# EAGLE board DMX_Transmiter v35 (EAGLE 9.7.0)
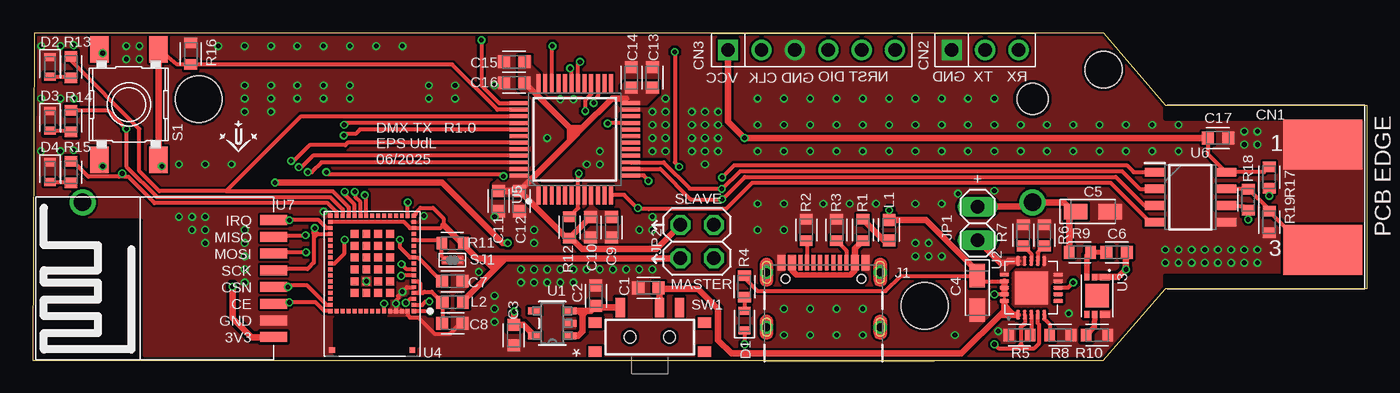
[diagram p0: board, top side]
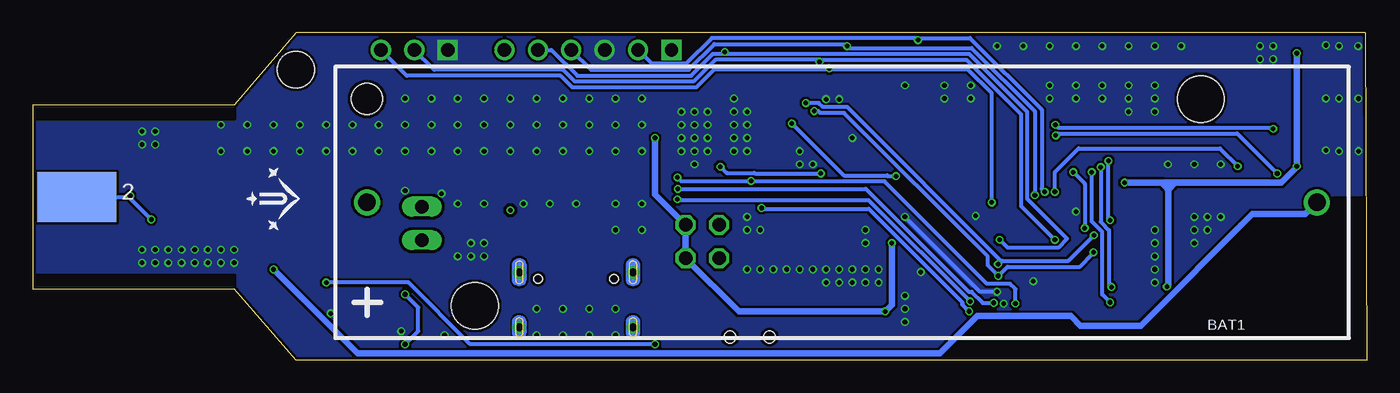
[diagram p1: board, bottom side, seen from below]

Size 101.4 x 24.9 mm. Coordinates in mm from the lower left corner, seen from the top.
Outline: 0.1,24.9 0,0 81.4,0 86.1,5.4 101.4,5.4 101.4,19.4 86.1,19.4 81.4,24.9 0.1,24.9
Copper layers (1*16): Top / Bottom
Stack-up Default Layer Stack: Top User Defined 0.018mm / Dielectric-1 User Defined 1.55mm / Bottom User Defined 0.018mm
Design rules: minimum copper width 0.15mm, minimum drill size 0.35mm, copper clearance wire_polygon to wire_polygon 0.15mm, copper clearance wire_polygon to pad_smd 0.15mm, copper clearance wire_polygon to via 0.15mm, copper clearance pad_smd to pad_smd 0.15mm, copper clearance pad_smd to via 0.15mm, copper clearance via to via 0.15mm, copper clearance smd to pad (same net) 0mil, copper clearance smd to via (same net) 0mil, copper clearance smd to smd (same net) 0mil, dimension clearance 0.25mm, via restrict clearance 0mil, restrict clearance 0mil, drill distance 0.35mm, keepout clearance 0mil
Holes 2.8 mm at 81.4,22.1
RestrictTop: area 23,0.5 to 29.2,3.1; area 0.2,0 to 8.2,12.3; area 86.1,18.4 to 102.1,20.4; area 86.1,4.4 to 102.1,6.4
RestrictBottom: area 0.2,0 to 8.2,12.3; area 23,0.5 to 29.2,3.1; area 86.1,18.4 to 102.1,20.4; area 86.1,4.4 to 102.1,6.4

## Footprints (pad centres in the part's own frame; a part is rotated, then mirrored left to right if it is on the bottom)
BH_KEYSTONE_1043 = drill 1.32 pad 1.98: 1 0,0; 2 -72.22,0 | hole 3.55: -8.2,7.87; -63.4,-7.87 | hole 2.39: 0,-7.87
CAPC1608X85 = smd 0.921 x 0.97: 1 -0.775,0; 2 0.775,0
CAPMP3216X180N = smd 1.796 x 1.189: 1 -1.31,0; 2 1.31,0
XLR_PINS = smd 6 x 3.8: 1 2.8,4; 3 2.8,-4 | smd 6 x 3.8 bottom: 2 2.8,0
CON_1X03_2.54 = drill 1.02 square: 1 -2.54,0 | drill 1.02: 2 0,0; 3 2.54,0
CON_1X06_2.54 = drill 1.016 square: 1 -6.35,0 | drill 1.016: 2 -3.81,0; 3 -1.27,0; 4 1.27,0; 5 3.81,0; 6 6.35,0
LEDC1608X35N_FLAT-Y = smd 0.612 x 0.912: A 0.75,0; C -0.75,0
LEDC1608X35N_FLAT-B = smd 0.612 x 0.912: A 0.75,0; C -0.75,0
LEDC1608X35N_FLAT-G = smd 0.612 x 0.912: A 0.75,0; C -0.75,0
LEDC1608X35N_FLAT-R = smd 0.612 x 0.912: A 0.75,0; C -0.75,0
GCT-USB4105GFA = smd 0.6 x 1.15: A1_B12 -3.2,4.914; A4_B9 -2.4,4.914; B1_A12 3.2,4.914; B4_A9 2.4,4.914 | smd 0.3 x 1.15: A5 -1.25,4.914; A6 -0.25,4.914; A7 0.25,4.914; A8 1.25,4.914; B5 1.75,4.914; B6 0.75,4.914; B7 -0.75,4.914; B8 -1.75,4.914 | drill 0.6 pad 1: SH1 -4.32,4.18; SH2 4.32,4.18; SH3 -4.32,0; SH4 4.32,0 | hole 0.65: 2.89,3.68; -2.89,3.68
1X02 = drill 1.016 long: 1 -1.27,0; 2 1.27,0
2X02 = drill 1.016 octagon: 1 -1.27,-1.27; 2 -1.27,1.27; 3 1.27,-1.27; 4 1.27,1.27
INDC1608X95N = smd 0.9 x 0.97: 1 -0.785,0 | smd 0.933 x 0.97: 2 0.769,0
RESC1608X60 = smd 0.799 x 0.974: 1 -0.815,0; 2 0.815,0
SWITCH_6X6X7.3 = smd 2 x 1.4: 1 -4.2,2.25; 2 4.2,2.25; 3 -4.2,-2.25; 4 4.2,-2.25
SOLDER_JUMPER_2_SMALL_OFF = smd 0.4 x 0.4: 1 -0.5,0; 2 0.5,0
MSK-12C02 = smd 0.7 x 1.5: O -2.25,2.25; P 0.75,2.25; S 2.25,2.25 | smd 1 x 0.8: P$1 -4.15,1.1; P$2 -4.15,-1.1; P$3 4.15,-1.1; P$4 4.15,1.1 | hole 0.9: -1.5,0; 1.5,0
SOT23_DBV_TEX = smd 0.972 x 0.508: 1 -1.362,0.95; 2 -1.362,0; 3 -1.362,-0.95; 4 1.362,-0.95; 5 1.362,0.95
QFN50P400X400X100-21N = smd 0.73 x 0.3: 1 -2.05,1; 2 -2.05,0.5; 3 -2.05,0; 4 -2.05,-0.5; 5 -2.05,-1; 11 2.05,-1; 12 2.05,-0.5; 13 2.05,0; 14 2.05,0.5; 15 2.05,1 | smd 0.3 x 0.73: 6 -1,-2.05; 7 -0.5,-2.05; 8 0,-2.05; 9 0.5,-2.05; 10 1,-2.05; 16 1,2.05; 17 0.5,2.05; 18 0,2.05; 19 -0.5,2.05; 20 -1,2.05 | smd 2.5 x 2.5: 21 0,0
U-DFN2030-6 = smd 0.5 x 0.75: 1 -1.42,0.6; 6 1.42,0.6 | smd 0.5 x 0.4: 2 -1.42,-0.175; 3 -1.42,-0.775; 4 1.42,-0.775; 5 1.42,-0.175 | smd 1.76 x 1.8: 7 0,0
SIP-LGA86 = smd 0.35 x 0.35: 1 -3.175,2.075; 17 -3.175,-5.175; 31 3.175,-5.175; 47 3.175,2.075 | smd 0.35 x 0.3: 2 -3.175,1.6; 3 -3.175,1.15; 4 -3.175,0.7; 5 -3.175,0.25; 6 -3.175,-0.2; 7 -3.175,-0.65; 8 -3.175,-1.1; 9 -3.175,-1.55; 10 -3.175,-2; 11 -3.175,-2.45; 12 -3.175,-2.9; 13 -3.175,-3.35; 14 -3.175,-3.8; 15 -3.175,-4.25; 16 -3.175,-4.7; 32 3.175,-4.7; 33 3.175,-4.25; 34 3.175,-3.8; 35 3.175,-3.35; 36 3.175,-2.9; 37 3.175,-2.45; 38 3.175,-2; 39 3.175,-1.55; 40 3.175,-1.1; 41 3.175,-0.65; 42 3.175,-0.2; 43 3.175,0.25; 44 3.175,0.7; 45 3.175,1.15; 46 3.175,1.6 | smd 0.3 x 0.35: 18 -2.7,-5.175; 19 -2.25,-5.175; 20 -1.8,-5.175; 21 -1.35,-5.175; 22 -0.9,-5.175; 23 -0.45,-5.175; 24 0,-5.175; 25 0.45,-5.175; 26 0.9,-5.175; 27 1.35,-5.175; 28 1.8,-5.175; 29 2.25,-5.175; 30 2.7,-5.175; 48 2.7,2.075; 49 2.25,2.075; 50 1.8,2.075; 51 1.35,2.075; 52 0.9,2.075; 53 0.45,2.075; 54 0,2.075; 55 -0.45,2.075; 56 -0.9,2.075; 57 -1.35,2.075; 58 -1.8,2.075; 59 -2.25,2.075; 60 -2.7,2.075 | smd 0.6 x 0.6: 61 -1.35,0.7; 62 -1.35,-0.2; 63 -1.35,-1.1; 64 -1.35,-2; 65 -1.35,-2.9; 66 -1.35,-3.8; 67 -0.45,-3.8; 68 0.45,-3.8; 69 1.35,-3.8; 70 1.35,-2.9; 71 1.35,-2; 72 1.35,-1.1; 73 1.35,-0.2; 74 1.35,0.7; 75 0.45,0.7; 76 -0.45,0.7; 77 -0.45,-0.2; 78 -0.45,-1.1; 79 -0.45,-2; 80 -0.45,-2.9; 81 0.45,-2.9; 82 0.45,-2; 83 0.45,-1.1; 84 0.45,-0.2 | smd 0.43 x 0.43: 85 -3.05,5.035; 86 3.05,5.035
QFP50P900X900X160-48N = smd 1.475 x 0.3: 1 -4.238,2.75; 2 -4.238,2.25; 3 -4.238,1.75; 4 -4.238,1.25; 5 -4.238,0.75; 6 -4.238,0.25; 7 -4.238,-0.25; 8 -4.238,-0.75; 9 -4.238,-1.25; 10 -4.238,-1.75; 11 -4.238,-2.25; 12 -4.238,-2.75; 25 4.238,-2.75; 26 4.238,-2.25; 27 4.238,-1.75; 28 4.238,-1.25; 29 4.238,-0.75; 30 4.238,-0.25; 31 4.238,0.25; 32 4.238,0.75; 33 4.238,1.25; 34 4.238,1.75; 35 4.238,2.25; 36 4.238,2.75 | smd 0.3 x 1.475: 13 -2.75,-4.238; 14 -2.25,-4.238; 15 -1.75,-4.238; 16 -1.25,-4.238; 17 -0.75,-4.238; 18 -0.25,-4.238; 19 0.25,-4.238; 20 0.75,-4.238; 21 1.25,-4.238; 22 1.75,-4.238; 23 2.25,-4.238; 24 2.75,-4.238; 37 2.75,4.238; 38 2.25,4.238; 39 1.75,4.238; 40 1.25,4.238; 41 0.75,4.238; 42 0.25,4.238; 43 -0.25,4.238; 44 -0.75,4.238; 45 -1.25,4.238; 46 -1.75,4.238; 47 -2.25,4.238; 48 -2.75,4.238
SOIC127P600X175-8N = smd 1.528 x 0.65: 1 -2.711,1.905; 2 -2.711,0.635; 3 -2.711,-0.635; 4 -2.711,-1.905; 5 2.711,-1.905; 6 2.711,-0.635; 7 2.711,0.635; 8 2.711,1.905
NRF24L01_MINI_MODULE = smd 2.032 x 0.762: 1 0,4.445; 2 0,3.175; 3 0,1.905; 4 0,0.635; 5 0,-0.635; 6 0,-1.905; 7 0,-3.175; 8 0,-4.445

## Placement (x,y rotation side)
BAT1  BATTERY_HOLDER_KEYSTONE_1043  [BH_KEYSTONE_1043]  76,12 180 bottom
C1  1uF  [CAPC1608X85]  46.8,5.5 180 top
C2  1uF  [CAPC1608X85]  42.8,4.9 90 top
C3  1uF  [CAPC1608X85]  36.56,1.9 270 top
C4  4.7uF  [CAPMP3216X180N]  71.8,5.1 270 top
C5  4.7uF  [CAPMP3216X180N]  80.6,11.3 0 top
C6  100nF  [CAPC1608X85]  82.4,8.2 0 top
C7  10uF  [CAPC1608X85]  31.9,6 0 top
C8  100nF  [CAPC1608X85]  31.9,2.8 0 top
C9  100nF  [CAPC1608X85]  44,10.1 90 top
C10  1uF  [CAPC1608X85]  42.4,10.1 90 top
C11  100nF  [CAPC1608X85]  35.4,12.1 90 top
C12  10uF  [CAPC1608X85]  37,12.1 90 top
C13  100nF  [CAPC1608X85]  47.1,21.5 90 top
C14  10uF  [CAPC1608X85]  45.5,21.5 90 top
C15  100nF  [CAPC1608X85]  36.6,22.7 180 top
C16  10uF  [CAPC1608X85]  36.6,21.1 180 top
C17  100nF  [CAPC1608X85]  90.1,16.9 0 top
CN1  XLR_CONNECTOR  [XLR_PINS]  95.25,12.4 0 top
CN2  CON_1X03/2.54  [CON_1X03_2.54]  72.4,23.6 0 top
CN3  CON_1X06  [CON_1X06_2.54]  59.2,23.6 0 top
D1  CHIP-FLAT-Y_0603-0.35MM  [LEDC1608X35N_FLAT-Y]  54.1,3 90 top
D2  CHIP-FLAT-B_0603-0.35MM  [LEDC1608X35N_FLAT-B]  1.3,22.3 270 top
D3  CHIP-FLAT-G_0603-0.35MM  [LEDC1608X35N_FLAT-G]  1.3,18.2 270 top
D4  CHIP-FLAT-R_0603-0.35MM  [LEDC1608X35N_FLAT-R]  1.3,14.3 270 top
J1  USB4105GFA  [GCT-USB4105GFA]  60.1,2.5 0 top
JP1  PINHD-1X2  [1X02]  71.83,10.4 270 top
JP2  PINHD-2X2  [2X02]  50.5,9.02 90 top
L1  3.3uH  [INDC1608X95N]  65.1,9.9 90 top
L2  BLM18AG601SN1D  [INDC1608X95N]  31.9,4.4 180 top
LOGO1  UDL_LOGO_MED  [UDL_LOGO_MED]  81.1,9.9 90 bottom
LOGO2  UDL_LOGO_SMALL  [UDL_LOGO_SMALL]  14.2,15.8 0 top
R1  0  [RESC1608X60]  63.1,9.9 270 top
R2  5K1  [RESC1608X60]  58.8,9.9 270 top
R3  5K1  [RESC1608X60]  61.1,9.9 270 top
R4  4K7  [RESC1608X60]  54.1,5.6 270 top
R5  4K7  [RESC1608X60]  75,1.9 180 top
R6  10K  [RESC1608X60]  76.9,9.5 270 top
R7  1K  [RESC1608X60]  75.3,9.5 270 top
R8  10K  [RESC1608X60]  78.1,1.9 180 top
R9  470  [RESC1608X60]  79.6,8.2 180 top
R10  2K7  [RESC1608X60]  80.9,1.9 180 top
R11  4K7  [RESC1608X60]  31.9,8.9 180 top
R12  4K7  [RESC1608X60]  40.8,10.1 90 top
R13  470  [RESC1608X60]  2.9,22.3 90 top
R14  470  [RESC1608X60]  2.9,18.2 90 top
R15  470  [RESC1608X60]  2.9,14.3 90 top
R16  100K  [RESC1608X60]  12,23.3 270 top
R17  10K  [RESC1608X60]  94,13.9 270 top
R18  120  [RESC1608X60]  92.4,12.2 90 top
R19  10K  [RESC1608X60]  94,10.5 270 top
S1  SWITCH_SMD_TACT_6X6  [SWITCH_6X6X7.3]  7.3,19.45 90 top
SJ1  0  [SOLDER_JUMPER_2_SMALL_OFF]  31.9,7.6 0 top
SW1  SWITCH_MSK-12C02  [MSK-12C02]  46.9,1.75 0 top
U1  TPS7A02  [SOT23_DBV_TEX]  39.5,2.8 180 top
U2  MCP73871_2CCI/ML  [QFN50P400X400X100-21N]  75.9,5.5 90 top
U3  AP9211SA-AC-HAC-7  [U-DFN2030-6]  80.9,4.9 270 top
U4  STM32WB5MMGH6TR  [SIP-LGA86]  25.8,5.8 180 top
U5  STM32L072CBT6  [QFP50P900X900X160-48N]  41.2,16.8 90 top
U6  SP3485EN-L  [SOIC127P600X175-8N]  88,12.4 0 top
U7  NRF24L01_MINI_MODULESMD  [NRF24L01_MINI_MODULE]  18.3,6.2 180 top

## Library data of the parts
BAT1 = Marcel-SystemsIntegration-24-25; DESCRIPTION: KEYSTONE - 1043 - BATTERY HOLDER, 18650, TH; HEIGHT: 14.86mm; MANUFACTURER_NAME: Keystone Electronics; MANUFACTURER_PART_NUMBER: 1043; MOUSER_PART_NUMBER: 534-1043; MOUSER_PRICE-STOCK: https://www.mouser.co.uk/ProductDetail/Keystone-Electronics/1043?qs=%2F7TOpeL5Mz6j%2FnxeOA1rsg%3D%3D
C1-C3 C6-C17 = Capacitor; CATEGORY: Capacitor; PACKAGE_SIZE: 0603; PACKAGE_TYPE: Surface Mount; SUBCATEGORY: Ceramic Capacitors; TYPE: MLCC
C4 C5 = Capacitor; CATEGORY: Capacitor; PACKAGE_SIZE: 1206; PACKAGE_TYPE: Surface Mount; SUBCATEGORY: Tantalum Capacitors; TYPE: Polymer Capacitors
CN1 = Library_projecte
CN2 CN3 LOGO1 LOGO2 SJ1 U7 = Marcel-SystemsIntegration-24-25
D1 = LED; CATEGORY: LED; COLOR: Yellow; DESCRIPTION: Yellow LED Indication 0603 (1608 Metric); PACKAGE_SIZE: 0603; PACKAGE_TYPE: Surface Mount; SUBCATEGORY: Chip LED; TYPE: Square with Flat Top
D2 = LED; CATEGORY: LED; COLOR: Blue; DESCRIPTION: Blue LED Indication 0603 (1608 Metric); PACKAGE_SIZE: 0603; PACKAGE_TYPE: Surface Mount; SUBCATEGORY: Chip LED; TYPE: Square with Flat Top
D3 = LED; CATEGORY: LED; COLOR: Green; DESCRIPTION: Green LED Indication 0603 (1608 Metric); PACKAGE_SIZE: 0603; PACKAGE_TYPE: Surface Mount; SUBCATEGORY: Chip LED; TYPE: Square with Flat Top
D4 = LED; CATEGORY: LED; COLOR: Red; DESCRIPTION: Red LED Indication 0603 (1608 Metric); PACKAGE_SIZE: 0603; PACKAGE_TYPE: Surface Mount; SUBCATEGORY: Chip LED; TYPE: Square with Flat Top
J1 = Marcel-SystemsIntegration-24-25; FARNELL_CODE: 3588205
JP1 = Connector; CATEGORY: Connectors; DESCRIPTION: Header-Straight-2 Position; PACKAGE_TYPE: Through Hole; PITCH: 0.100" (2.54mm); SUBCATEGORY: Headers; TYPE: Male Pins
JP2 = Connector; CATEGORY: Connectors; DESCRIPTION: Header-Straight-2x2 Position; PACKAGE_TYPE: Through Hole; PITCH: 0.100" (2.54mm); SUBCATEGORY: Headers; TYPE: Male Pins
L1 L2 = Inductor; CATEGORY: Inductors; DESCRIPTION: Chip 1.60 X 0.80 X 0.95 mm body 0603(1608-METRIC); PACKAGE_SIZE: 0603; PACKAGE_TYPE: Surface Mount
R1-R19 = Resistor; CATEGORY: Resistors; DESCRIPTION: Chip Resistor 1.60 X 0.82 X 0.60 mm body 0603(1608-METRIC) Package; PACKAGE_SIZE: 0603; PACKAGE_TYPE: Surface Mount
S1 = Marcel-SystemsIntegration-24-25; OC_EBAY: https://www.ebay.es/itm/183740462435; RS: 682-1254
SW1 = Marcel-SystemsIntegration-24-25; EBAY: https://www.ebay.es/itm/50pcs-MSK-12C02-2-Position-7pins-1P2T-Miniature-Horizontal-Slide-Switch/360895616269?hash=item54070e150d:g:IJoAAOSwxCxT4jcO; PROD_ID: SWCH-10651
U1 = Library_projecte; COPYRIGHT: Copyright (C) 2025 Ultra Librarian. All rights reserved.; MANUFACTURER_PART_NUMBER: TPS7A0212PDBVR; MFR_NAME: Texas Instruments
U2 = Marcel-SystemsIntegration-24-25; MANUFACTURER: MICROCHIP; MANUFACTURER_ID: MCP73871- 2CCI/ML; SOURCE: Farnell: 1642489
U3 = Marcel-SystemsIntegration-24-25; MANUFACTURER: Diodes Incorporated; MANUFACTURER_ID: AP9211SA-ACHAC- 7; SOURCE: Mouser; SOURCE_ID: 621- AP9211SA-ACHAC7
U4 = Marcel-SystemsIntegration-24-25; DESCRIPTION: 802.15.4, Bluetooth Bluetooth v5.0, Thread, Zigbee® Transceiver Module 2.4GHz Integrated, Chip Surface Mount; MF: STMicroelectronics; MP: STM32WB5MMGH6TR; PACKAGE: LFLGA-86 STMicroelectronics; PRICE: None; PURCHASE-URL: https://pricing.snapeda.com/search/part/STM32WB5MMGH6TR/?ref=eda
U5 = Marcel-SystemsIntegration-24-25; DESCRIPTION: ARM Microcontrollers - MCU 16/32-BITS MICROS; HEIGHT: 1.6mm; MANUFACTURER_NAME: STMicroelectronics; MANUFACTURER_PART_NUMBER: STM32L072CBT6; MOUSER_PART_NUMBER: 511-STM32L072CBT6; MOUSER_PRICE-STOCK: https://www.mouser.co.uk/ProductDetail/STMicroelectronics/STM32L072CBT6?qs=dTJS0cRn7ojAyJ%2FoC1SuOQ%3D%3D
U6 = Marcel-SystemsIntegration-24-25; DESCRIPTION: RS-485 Interface IC 3.3 V powered, up to 10 Mbps RS-485 transceiver; HEIGHT: 1.75mm; MANUFACTURER_NAME: MaxLinear; MANUFACTURER_PART_NUMBER: SP3485

## Nets
2.8V: C3.1 C17.1 CN3.1 JP2.1 JP2.3 R17.1 S1.1 S1.2 U1.5 U6.8 U7.1
A: CN1.2 R17.2 R18.1 U6.6
B: CN1.3 R18.2 R19.1 U6.7
DMX_DE: U4.2 U5.14 U6.3
DMX_RE: U4.3 U5.15 U6.2
DMX_RX: U4.56 U5.13 U6.1
DMX_TX: U4.1 U5.12 U6.4
GND: C1.2 C2.2 C3.2 C4.2 C5.2 C7.2 C8.2 C9.1 C10.1 C11.1 C12.1 C13.2 C14.2 C15.2 C16.2 C17.2 CN1.1 CN2.1 CN3.3 D2.C D3.C D4.C J1.A1_B12 J1.B1_A12 R2.1 R3.1 R5.2 R6.1 R7.1 R8.1 R10.1 R16.1 R19.2 SJ1.2 U1.2 U2.9 U2.10 U2.11 U2.21 U3.6 U4.5 U4.16 U4.31 U4.57 U4.58 U4.59 U4.60 U4.84 U4.86 U5.8 U5.23 U5.35 U5.44 U5.47 U6.5 U7.2
LED_BLUE: R13.2 U4.28 U5.39
LED_GREEN: R14.2 U4.29 U5.40
LED_RED: R15.2 U4.30 U5.41
MASTER_VCC: JP2.2 L2.1 R11.1 U4.15 U4.17 U4.32
N$1: J1.B5 R3.2
N$2: J1.A5 R2.2
N$3: J1.A4_B9 J1.B4_A9 R1.2
N$4: L1.1 R1.1
N$5: D1.A R4.2
N$6: C8.1 L2.2 U4.4 U4.6
N$7: R11.2 SJ1.1 U4.13
N$8: D2.A R13.1
N$9: D3.A R14.1
N$10: D4.A R15.1
N$11: D1.C U2.8
N$12: R5.1 U2.3
N$13: C6.1 R9.1 U3.3
N$14: BAT1.2 C6.2 U3.1 U3.2
N$15: R8.2 U2.5
N$16: R7.2 U2.13
N$17: R6.2 U2.12
N$18: R10.2 U3.5
N$19: JP1.2 U2.14 U2.15 U2.16
N$21: C2.1 SW1.O U1.1 U1.3
NRF24_CE: U4.47 U5.46 U7.3
NRF24_CSN: U4.46 U5.45 U7.4
NRF24_IRQ: U4.33 U5.43 U7.8
NRST: C7.1 CN3.5 R12.2 U4.10 U5.7
PUSHBUTTON: R16.2 S1.3 S1.4 U4.27 U5.38
SLAVE_VCC: C9.2 C10.2 C11.2 C12.2 C13.1 C14.1 C15.1 C16.1 JP2.4 R12.1 U5.1 U5.9 U5.24 U5.36 U5.48
SPI2_MISO: U4.8 U5.27 U7.7
SPI2_MOSI: U4.7 U5.28 U7.6
SPI2_SCK: U4.34 U5.21 U7.5
SWCLK: CN3.2 U4.26 U5.37
SWDIO: CN3.4 U4.25 U5.34
USART1_RX: CN2.3 U4.18 U5.31
USART1_TX: CN2.2 U4.39 U5.30
VBAT: BAT1.1 C5.1 JP1.1 R9.2
VIN: C4.1 L1.2 R4.1 U2.2 U2.4 U2.17 U2.18 U2.19
VLOAD: C1.1 SW1.P U2.1 U2.20

## Tracks (layer width: path | path; a pad name or v marks a point on that pad's centre or on a via)
2.8V  (via drill 0.35)
  Top 0.3: 89.23,16.78 C17.1 89.32,15.69 U6.8 93.59,14.3 R17.1
  Top 0.5: U7.1 16.62,1.74 15.18,3.18 v15.18,5.58 v15.19,5.58 | S1.1 v5.31,14.75 | S1.2 v5.31,23.35 | v18.4,13.5 31.1,13.5 35.7,8.9 v36.1,8.9 | CN3.1 52.85,18.15 v54.1,16.9 C17.1 | U1.5 37.31,2.67 C3.1 36.6,2.72 v36.6,3.7
  Bottom 0.4: 14.5,13.5 15.08,12.92
  Bottom 0.5: v18.4,13.5 15.6,13.5 15.59,13.5 | 15.59,13.5 15.08,12.99 15.08,12.92 | 15.08,12.92 15.08,5.69 v15.19,5.58 | v5.31,23.35 v5.31,14.75 5.31,14.69 6.5,13.5 14.5,13.5 15.59,13.5 | 15.1,12.93 15.08,12.92 | v36.1,8.9 36.1,4.2 v36.6,3.7 47.72,3.7 JP2.1 JP2.3 54.1,12.62 v54.1,16.9
A  (via drill 0.35)
  Top 0.3: U6.6 90.79,11.69 92.1,11.69 R18.1 92.44,10.75 v92.4,10.7 | v94,12.5 R17.2
  Bottom 0.3: 98.45,11.8 CN1.2 94.1,12.4 v94,12.5 94,12.3 v92.4,10.7
B
  Top 0.3: U6.7 90.73,13.02 R18.2 94,11.46 R19.1 96.91,8.4 CN1.3
DMX_DE  (via drill 0.35)
  Top 0.3: U5.14 47.7,14.55 50.01,12.24 v52.4,12.24 52.59,12.43 52.62,12.43 54.13,13.93 82.33,13.93 84.5,11.77 U6.3 | U4.2 29.6,4.2 29.86,4.46 v30.14,4.46
  Bottom 0.3: v52.4,12.24 52.34,12.18 37.86,12.18 v30.14,4.46
DMX_RE  (via drill 0.35)
  Top 0.3: U5.15 47.95,15.05 49.96,13.04 52.36,13.04 | 52.36,13.04 52.44,13.04 53.78,14.38 82.8,14.38 84.15,13.04 U6.2 | U4.3 28.68,4.65 28.38,4.35 v28.35,4.35 | v52.37,13.03 52.36,13.04
  Bottom 0.3: v28.35,4.35 29.19,4.35 30.04,5.2 30.25,5.2 38.07,13.03 v52.37,13.03
DMX_RX  (via drill 0.35)
  Top 0.3: U4.56 v26.7,4.3 | U5.13 46.44,14.05 46.8,13.69 v46.8,13.64 | v52.4,13.9 53.33,14.83 83.16,14.83 83.69,14.3 U6.1
  Bottom 0.3: v52.4,13.9 52.1,13.6 46.84,13.6 v46.8,13.64 46.76,13.6 36.65,13.6 28.86,5.8 27.1,5.8 26.7,5.4 v26.7,4.3
DMX_TX  (via drill 0.35)
  Top 0.3: 46,11.51 46,11.49 46.84,11.49 46.85,11.5 52.7,11.5 54.68,13.48 81.94,13.48 84.93,10.5 U6.4 | 46,11.51 44.95,12.56 U5.12 | v30.21,3.71 30.2,3.73 U4.1 | 46,11.51 v46,11.58
  Bottom 0.3: v30.21,3.71 30.37,3.86 30.39,3.86 30.74,4.21 30.74,4.39 37.85,11.5 45.93,11.5 v46,11.58
GND  (via drill 0.35)
  Top 0.3: U4.57 U4.58 | U4.58 U4.59 U4.60 28.5,3.43 28.68,3.25 29.31,3.25 30.54,2.02 31.71,2.02 32.5,2.8 C8.2 | U4.58 v27.6,4.3 27.6,4.53 27.75,4.68 27.75,4.85 v28.1,5.2 28.45,5.55 U4.5
  Bottom 0.3: v28.1,5.2 29.4,5.2 v35.1,10.9
  other vias: 73.4,2.2 13.1,8.9 93.1,17.4 93.1,16.4 92.1,16.4 92.1,17.4 90.1,8.4 93.1,7.4 92.1,7.4 89.1,7.4 90.1,7.4 91.1,7.4 91.1,8.4 92.1,8.4 93.1,8.4 79.1,17.9 75.1,17.9 73.1,17.9 73.1,19.9 71.1,19.9 71.1,17.9 69.1,17.9 69.1,19.9 67.1,19.9 67.1,17.9 65.1,17.9 65.1,19.9 63.1,19.9 63.1,17.9 61.1,17.9 61.1,19.9 59.1,19.9 59.1,17.9 22.1,11.3 25.35,6 59.1,15.9 61.1,15.9 63.1,15.9 65.1,15.9 67.1,15.9 69.1,15.9 71.1,15.9 73.1,15.9 75.1,15.9 77.1,15.9 79.1,15.9 81.1,15.9 83.1,15.9 70.1,1.9 60.1,11.9 62.1,11.9 64.1,11.9 69.1,7.9 67.1,7.9 63.1,3.9 57.1,3.9 57.1,1.9 63.1,1.9 35.1,20.9 38.1,9.9 81.1,17.9 69.1,11.9 67.1,11.9 35.1,2.9 33.9,6.7 35.1,4.9 35.1,3.9 13.1,9.9 16.1,9.9 16.1,8.9 16.1,7.9 16.1,6.9 16.1,5.9 16.1,23.9 18.1,23.9 20.1,23.9 22.1,23.9 14.1,23.9 24.1,23.9 48.1,16.9 48.1,18.9 8.1,23.9 7.1,23.9 7.1,22.9 8.1,22.9 13.1,10.9 12.1,10.9 12.1,9.9 11.1,10.9 2.1,23.9 2.1,19.9 3.1,23.96 3.1,19.9 0.63,19.9 0.65,23.9 0.61,15.9 2.1,15.9 3.1,15.96 16.1,20.9 16.1,18.9 18.1,18.9 18.1,20.9 20.1,20.9 22.1,20.9 24.1,20.9 32.1,20.9 32.1,19.9 30.1,19.9 24.1,19.9 22.1,19.9 20.1,19.9 18.1,19.9 16.1,19.9 15.1,14.9 13.1,14.9 11.1,14.9 78.76,3.54 30.1,20.9 83.1,17.9 29.72,10.98 57.1,17.9 57.1,19.9 55.1,19.9 55.1,17.9 55.1,15.9 57.1,15.9 51.1,18.9 51.1,16.9 51.1,14.9 77.1,17.9 88.1,7.4 87.1,7.4 86.1,7.4 86.1,8.4 87.1,8.4 88.1,8.4 89.1,8.4 73.1,12.88 70.34,12.66 37.1,5.9 38.1,5.9 39.1,5.9 40.1,5.9 41.1,5.9 37.1,6.9 38.1,6.9 39.1,6.9 40.1,6.9 41.1,6.9 42.1,6.9 43.1,6.9 44.1,6.9 45.1,6.9 46.1,6.9 47.1,6.9 47.1,9.9 46.1,9.9 47.1,10.9 38.1,8.9 26.1,23.9 28.1,23.9 48.1,17.9 48.1,15.9 50.1,15.9 50.1,17.9 50.1,18.9 51.1,17.9 50.1,16.9 51.1,15.9 52.1,15.9 52.1,16.9 52.1,17.9 52.1,18.9 47.1,18.9 47.1,17.9 47.1,16.9 47.1,15.9 43.1,15.9 43.1,14.9 42.1,14.9 48.1,19.9 39.1,16.9 40.1,19.85 41.1,19.85 57.1,11.9 55.1,11.9 55.1,9.9 57.1,9.9 68.1,8.9 67.1,8.9 68.1,7.9 59.1,3.9 59.1,1.9 61.1,1.9 61.1,3.9 85.1,17.9 87.1,17.9 85.1,15.9 87.1,15.9
  pour Top (isolate 0.2, rank 2, no thermals): -1.9,27.9 104.1,27.9 104.1,-3.1 -1.9,-3.1
  pour Bottom (isolate 0.2, no thermals): -1.9,27.9 104.1,27.9 104.1,-3.1 -1.9,-3.1
LED_BLUE
  Top 0.3: U4.28 24,11.65 22.8,12.85 14.7,12.85 | 14.7,12.85 9.62,12.85 8.1,14.37 8.1,17.59 2.9,22.79 R13.2 | 14.7,12.85 20.4,18.55 U5.39
LED_GREEN  (via drill 0.35)
  Top 0.3: U4.29 23.55,11.46 22.61,12.4 9.44,12.4 7.11,14.73 v7.11,17.59 5.68,19.01 R14.2 | U5.40 23.66,18.05 v23.66,17.9
  Bottom 0.3: v23.66,17.9 23.46,17.7 7.21,17.7 v7.11,17.59
LED_RED  (via drill 0.35)
  Top 0.3: U4.30 23.1,11.27 22.42,11.95 9.25,11.95 7.25,13.95 7.04,13.95 | U5.41 24.87,17.55 24.52,17.2 23.74,17.2 v23.64,17.09 | 6.54,13.95 4.23,13.95 3.06,15.12 R15.2 | 6.54,13.95 v6.79,14.2 7.04,13.95 | 7.04,13.95 6.54,13.95
  Bottom 0.3: v23.64,17.09 23.49,17.24 9.84,17.24 v6.79,14.2
MASTER_VCC
  Top 0.3: 29,10.95 U4.17 29.12,11.12 29.12,11.23 29.47,11.58 30.42,11.58 31.21,10.79 31.21,10.29 30.98,10.05 U4.15 28.68,10.05 28.23,10.5 U4.32
  Top 0.5: 32.6,8.9 R11.1 | 31.21,10.29 32.6,8.9 | L2.1 32.69,4.49 35.1,6.9 | 35.95,7.75 JP2.2 | 34.25,7.75 33.75,7.75 32.6,8.9 | 35.1,6.9 35.95,7.75 | 35.95,7.75 35.1,7.75 | 35.1,7.75 35.1,6.9 | 35.1,6.9 34.25,7.75 | 35.1,7.75 34.25,7.75
N$1
  Top 0.3: R3.2 61.85,8.34 J1.B5
N$2
  Top 0.3: R2.2 58.85,9.04 J1.A5
N$3
  Top 0.4: J1.A4_B9 57.7,6.83 58.05,6.48 62.15,6.48 62.5,6.83 J1.B4_A9
  Top 0.5: R1.2 62.5,8.49 J1.B4_A9
N$4
  Top 0.5: L1.1 64.7,9.12 R1.1
N$5
  Top 0.3: R4.2 D1.A
N$6
  Top 0.3: 29.63,5.1 U4.4 | C8.1 L2.2 30.33,5.2 29.75,5.2 29.65,5.1 29.63,5.1 | U4.6 29.27,6 29.45,5.82 29.45,5.28 | 29.45,5.28 29.27,5.1 | 29.45,5.28 29.63,5.1
N$7
  Top 0.3: SJ1.1 31.09,7.92 R11.2 30.84,9.15 U4.13
N$8
  Top 0.3: D2.A 2.83,21.55 R13.1
N$9
  Top 0.3: D3.A 2.83,17.45 R14.1
N$10
  Top 0.3: R15.1 2.83,13.45 2.73,13.55 D4.A
N$11  (via drill 0.35)
  Top 0.3: v79.1,5.9 78.7,5.5 U2.8 | D1.C v54.1,1.2
  Bottom 0.3: v54.1,1.2 68.15,1.2 72.85,5.9 v79.1,5.9
N$12
  Top 0.3: U2.3 75.9,1.92 R5.1
N$13
  Top 0.4: U3.3 80.11,7.93 R9.1 81.57,8.23 C6.1
N$14  (via drill 0.35)
  Top 0.5: U3.2 U3.1 82.52,6.32 v83.1,6.9 83.1,8.12 C6.2
  Bottom 0.5: v83.1,6.9 76.7,0.5 32.43,0.5 29.58,3.35 22.5,3.35 21.75,2.6 17.18,2.6 8.68,11.1 4.68,11.1 BAT1.2
N$15
  Top 0.3: U2.5 76.9,3.12 77.31,2.71 R8.2
N$16
  Top 0.3: U2.13 75.9,8.09 R7.2
N$17
  Top 0.3: U2.12 76.4,8.19 R6.2
N$18
  Top 0.4: R10.2 80.71,2.53 U3.5
N$19
  Top 0.5: JP1.2 73.56,7.4 74,7.4 74.15,7.55 U2.15
  pour Top (no thermals): 74.2,6.4 73.5,6.4 73.5,7.9 75.5,7.9 75.5,7.2 74.7,7.2 74.2,6.7
N$21
  Top 0.5: SW1.O 42.93,4 C2.1 42.43,3.75 42.1,3.75 | 42.1,3.75 U1.3 41.5,3.75 41.8,3.45 | 42.1,3.75 41.8,3.45 | 41.8,3.45 41.8,2.2 41.45,1.85 U1.1
NRF24_CE  (via drill 0.35)
  Top 0.3: U7.3 18.4,4.4 v19.5,4.4 21.49,4.4 22.14,3.75 22.6,3.75 U4.47 | U5.46 21.95,15.05 21.2,14.3 v20.9,14.3
  Bottom 0.3: v19.5,4.4 20.1,5 20.1,9.76 20.9,10.56 v20.9,14.3
NRF24_CSN  (via drill 0.35)
  Top 0.3: U4.46 22.33,4.2 20.86,5.67 19.5,5.67 v19.4,5.57 U7.4 | v20.22,14.68 20.43,14.68 21.3,15.55 U5.45
  Bottom 0.3: v19.4,5.57 19.58,5.74 19.58,9.88 20.22,10.52 v20.22,14.68
NRF24_IRQ  (via drill 0.35)
  Top 0.3: U4.33 22.33,10.05 21.73,10.64 v19.5,10.64 | v19.5,10.64 U7.8 | v19.5,10.64 | v19.63,15.15 19.84,15.15 21.04,16.35 23.74,16.35 23.94,16.55 U5.43
  Bottom 0.3: v19.63,15.15 19.63,14.94 19.62,14.93 19.62,10.76 v19.5,10.64
NRST  (via drill 0.35)
  Top 0.3: C7.1 31.07,6 29.27,7.8 U4.10 28.68,7.8 27.9,8.58 v27.9,9.16 | R12.2 41.45,11.56 U5.7 41.45,13.95 41.5,14 v41.5,14.2 | v48.8,23.45 48.8,15.05 v49.14,14.71
  Bottom 0.3: CN3.5 61.97,23.6 60.01,21.64 51.36,21.64 49.7,23.3 48.8,23.3 | v48.8,23.45 48.8,23.3 | 48.8,23.3 30.23,23.3 25.83,18.9 25.83,12.3 22.8,9.27 22.8,9.2 23.45,8.55 27.29,8.55 v27.9,9.16 | v49.14,14.71 48.66,14.24 46.55,14.24 46.51,14.2 v41.5,14.2
PUSHBUTTON  (via drill 0.35)
  Top 0.3: R16.2 11.17,22.48 | R16.2 31.88,22.48 35.31,19.05 U5.38 | U4.27 24.45,11.83 23.7,12.59 v23.7,12.8 | S1.4 10.97,22.48 R16.2
  Top 0.5: S1.4 S1.3 v9.81,14.75
  Bottom 0.3: v23.7,12.8 23.7,14.3 21.9,16.1 11.16,16.1 v9.81,14.75
SLAVE_VCC
  Top 0.5: C12.2 C11.2 | C12.2 40.84,16.71 | 40.84,16.71 41.06,16.94 | 41.06,16.94 41.76,17.64 | 41.76,17.64 44.02,19.9 45.1,19.9 | C16.1 40.84,17.64 | 40.84,17.64 41.06,17.41 41.06,16.94 | 40.84,17.64 41.76,17.64 | 40.84,17.64 40.84,16.71 | C12.2 40.59,9.29 R12.1 | C10.2 R12.1 | R12.1 40.93,9.29 41.75,8.46 47.41,8.46 JP2.4
  pour Top (no thermals): 38.6,20.3 37.2,20.3 36.9,20.6 36.9,23.2 37.9,23.2 37.9,22.5 38.6,21.8
  pour Top (no thermals): 44.7,19.4 44.7,20.9 45,21.2 47.6,21.2 47.6,20.3 46.7,19.4
  pour Top (no thermals): 42.6,13.3 42.6,11.8 43,11.4 44.5,11.4 44.5,10.4 41.9,10.4 41.9,11.3 42.3,11.7 42.3,13.3
  pour Top (no thermals): 37.7,14.2 38.6,13.3 38.6,11.8 37.8,11.8 37.2,12.4 34.9,12.4 34.9,13.4 35.7,14.2
SPI2_MISO  (via drill 0.35)
  Top 0.3: v42.64,19.56 42.64,19.78 42.95,20.09 U5.27 | v20.73,9.5 18.43,9.5 U7.7 | U4.8 28.42,6.9 v28.02,7.3
  Bottom 0.3: v28.02,7.3 28.02,7.23 27.73,7.53 | v20.73,9.5 22.68,7.55 27.7,7.55 27.73,7.53 | 27.73,7.53 27.76,7.53 39.49,19.25 41.35,19.25 41.66,19.56 v42.64,19.56
SPI2_MOSI  (via drill 0.35)
  Top 0.3: U5.28 42.45,20.23 42,19.78 v42,18.95 | v20.76,8.2 18.4,8.2 U7.6 | v28,6.4 28.05,6.45 U4.7
  Bottom 0.3: v20.76,8.2 20.76,8.14 21.8,7.1 27.3,7.1 v28,6.4 | v28,6.4 28.8,7.2 28.8,7.87 39.73,18.8 41.54,18.8 41.69,18.95 v42,18.95 | v28,6.4 28.06,6.47
SPI2_SCK  (via drill 0.35)
  Top 0.3: U5.21 43.75,18.05 v43.7,18 | U7.5 18.4,6.94 20.88,6.94 21.36,7.41 21.36,9.3 | 21.36,9.6 21.66,9.6 | 21.66,9.6 U4.34 | 21.36,9.6 21.36,9.9 | 21.36,9.6 21.36,9.3 | v22.3,14.3 22.45,14.15 35.62,14.15 v35.77,14 | 21.36,9.3 21.66,9.6 | 21.66,9.6 21.36,9.9 | 21.36,9.9 21.36,9.98 v21.43,10.04
  Bottom 0.3: v22.3,14.3 21.43,13.43 v21.43,10.04 | v43.7,18 39.75,14.05 36.47,14.05 36.41,14 v35.77,14
SWCLK  (via drill 0.35)
  Top 0.3: U4.26 24.9,12.02 24.55,12.37 24.55,12.72 v24.48,12.8 | v34.1,24.35 34.1,20.9 35.45,19.55 U5.37
  Bottom 0.3: CN3.2 54.33,22.54 51.73,22.54 49.77,24.5 34.1,24.5 | 34.1,24.5 v34.1,24.35 | v24.48,12.8 24.7,13.03 24.7,19.05 30.15,24.5 34.1,24.5
SWDIO  (via drill 0.35)
  Top 0.3: U4.25 25.35,12.42 v25.23,12.54 v25.23,12.55 | v39.5,23.9 39.45,23.85 U5.34
  Bottom 0.3: CN3.4 58.96,22.09 51.55,22.09 49.59,24.05 39.5,24.05 v39.5,23.9 39.35,23.75 30.04,23.75 25.23,18.93 v25.23,12.55
USART1_RX  (via drill 0.35)
  Top 0.3: U5.31 40.95,22.1 v40.85,22.2 | U4.18 v28.5,12
  Bottom 0.3: CN2.3 72.98,21.64 61.28,21.64 60.38,20.74 50.99,20.74 49.63,22.1 40.95,22.1 | 40.75,22.1 30.3,22.1 28.5,20.3 v28.5,12 | 40.75,22.1 40.95,22.1 | 40.75,22.1 v40.85,22.2 40.95,22.1
USART1_TX  (via drill 0.35)
  Top 0.3: U4.39 22.92,7.35 23.7,8.13 v23.7,9.15 | U5.30 41.45,22.55 v41.6,22.7
  Bottom 0.3: 41.6,22.85 49.51,22.85 51.18,21.19 60.2,21.19 61.1,22.09 70.89,22.09 CN2.2 | v41.6,22.7 41.6,22.85 | v23.7,9.15 26.28,11.72 26.28,18.71 30.41,22.85 41.6,22.85
VBAT
  Top 0.5: R9.2 78.78,10.79 C5.1 79.1,11.3 78.4,12 BAT1.1 75.67,11.67 JP1.1
VIN  (via drill 0.35)
  Top 0.3: U2.17 72.19,6 C4.1 65.98,6.41 64.83,5.26 55.1,5.26 54.1,6.26 R4.1 | 75.1,1.2 75.4,0.9 | U2.4 76.4,2.8 76.52,2.69 76.52,1.29 76.13,0.9 75.4,0.9 | U2.19 v73.1,5 | v73.1,1.2 73.4,0.9 74.8,0.9 | 74.8,0.9 75.4,0.9 | 75.1,1.2 74.8,0.9 | U2.2 75.4,2.73 75.36,2.69 75.29,2.69 75.1,2.5 75.1,1.2 | L1.2 v65.1,11.4
  Top 0.5: U2.17 U2.18 U2.19 | L1.2 67.88,10.67 71.8,6.75 C4.1
  Bottom 0.3: v73.1,5 72.1,4 72.1,2.2 v73.1,1.2
VLOAD
  Top 0.5: U2.20 73.85,4.15 | 73.85,4.15 74.05,3.95 | 74.05,3.95 74.4,3.6 | 74.4,3.6 74.4,3.5 | U2.1 74.55,3.45 | 74.55,3.45 74.4,3.6 | 74.05,3.95 73.85,3.75 | 73.85,4.15 73.85,3.75 | 73.85,3.75 73.55,3.45 | 74.55,3.45 73.55,3.45 | 73.55,3.45 70.6,0.5 53.1,0.5 52.1,1.5 52.1,3.9 50.58,5.43 47.65,5.43 C1.1 47.65,5.38 SW1.P

## Text on the board
SilkscreenTop: CLK | GND | DIO | NRST | VCC | GND | TX | RX | DMX TX R1.0 / EPS UdL / 06/2025 | + | SLAVE | MASTER | U1